# EAGLE board relay-shield (EAGLE 6.4)
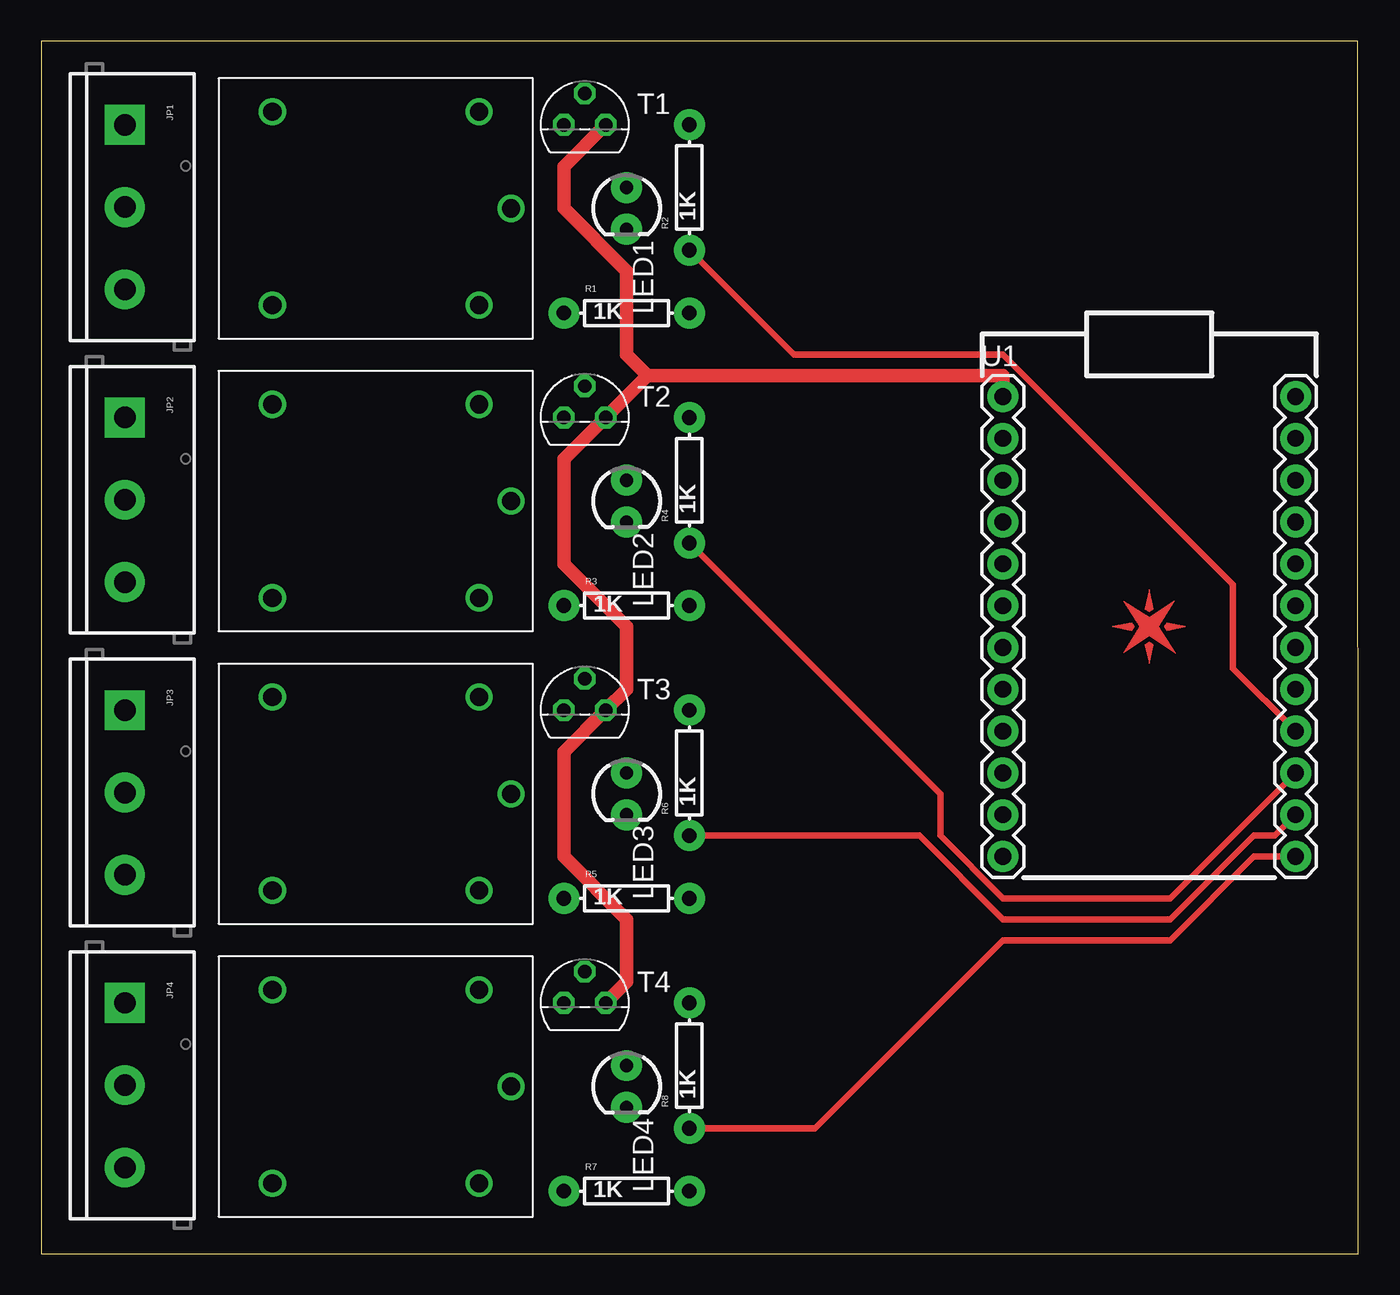
[diagram p0: board, top side]
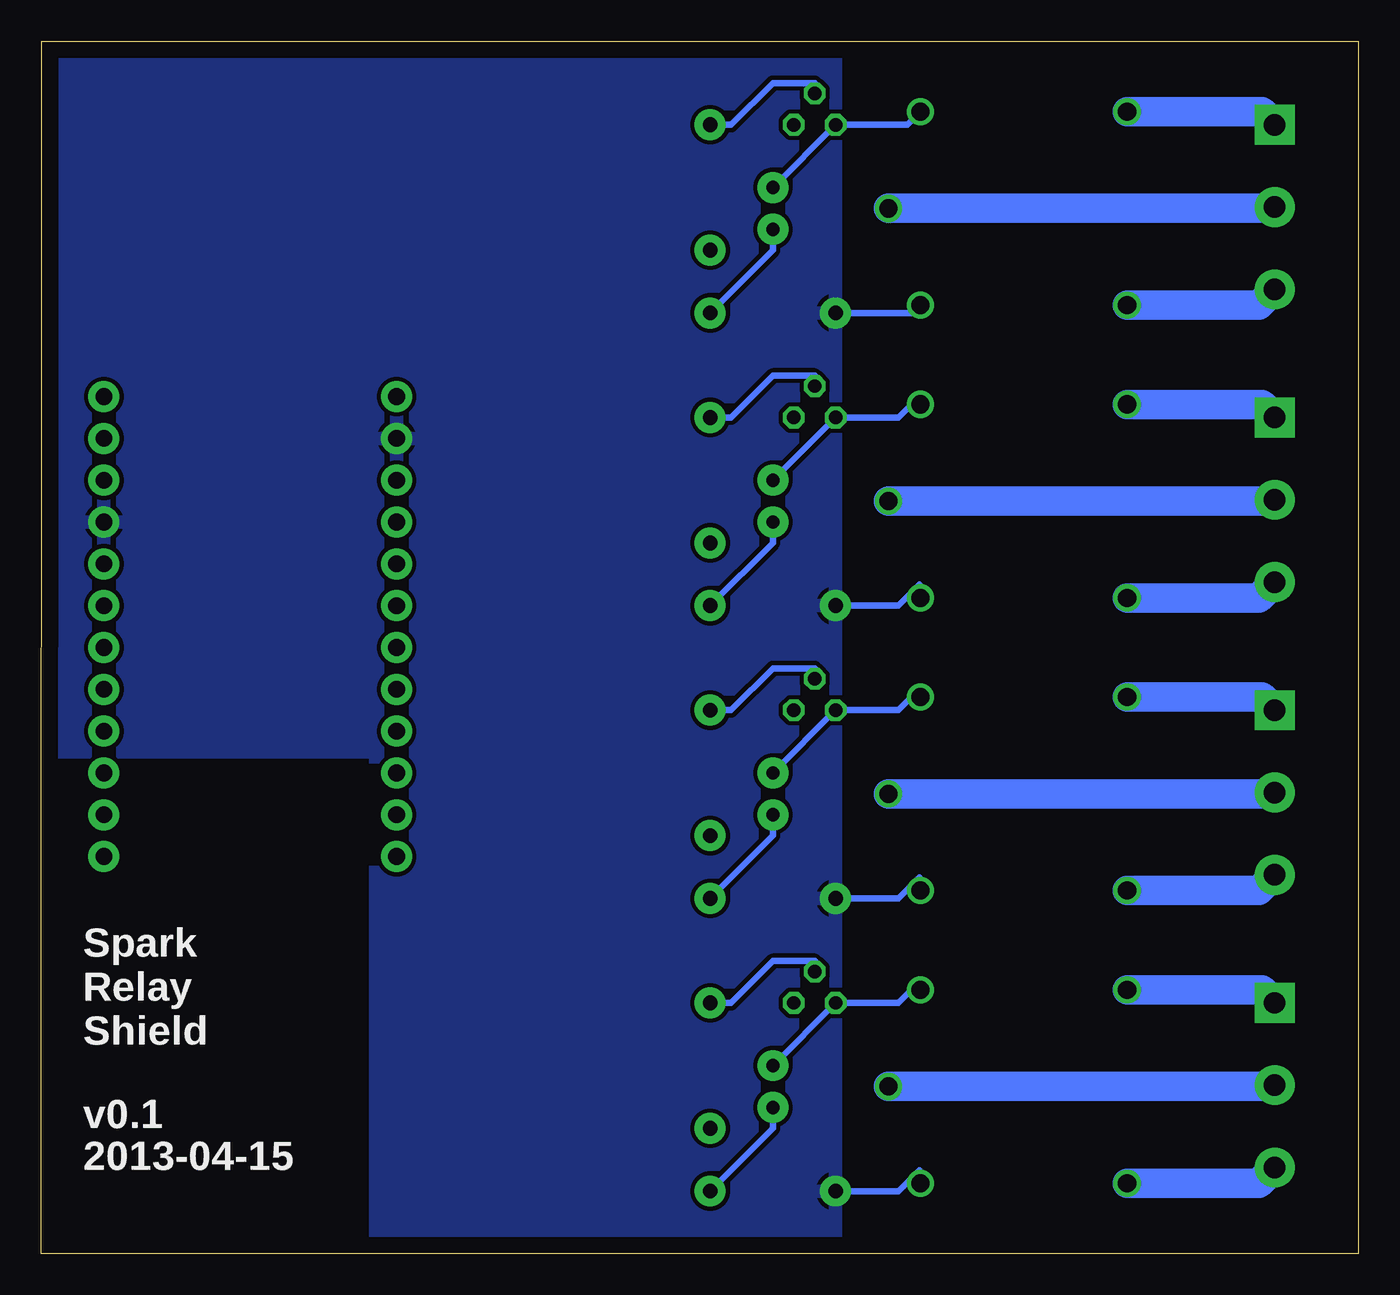
[diagram p1: board, bottom side, seen from below]

Size 80.01 x 73.66 mm. Coordinates in mm from the lower left corner, seen from the top.
Outline: 0,0 80.01,0 79.99,73.66 0,73.66 0,0
Copper layers (1*16): Top 0.035mm / dielectric 1.5mm / Bottom 0.035mm
Design rules "default *": minimum track width 10mil, minimum drill 0.3mm, track to track 10mil, track to pad 10mil, pad to pad 10mil, via to via 10mil, smd to smd 10mil, copper to edge 40mil, drill to drill 8mil, minimum pad ring 10mil, minimum via ring 8mil, stop-mask expansion 4mil, vias tented up to drill 0mil, thermal gap 10mil

## Footprints (pad centres in the part's own frame; a part is rotated, then mirrored left to right if it is on the bottom)
SCREWTERMINAL-5MM-3 = drill 1.3 pad 2.413 square: 1 0,0 | drill 1.3 pad 2.413: 2 5,0; 3 10,0
LED3MM = drill 0.813 pad 1.88: A -1.27,0; K 1.27,0
AXIAL-0.3 = drill 0.9 pad 1.88: P$1 -3.81,0; P$2 3.81,0
TO92 = drill 0.813 octagon: 1 1.27,0; 2 0,1.905; 3 -1.27,0
SPARK_CORE = drill 1.016 pad 1.88: 1 -8.89,13.97; 2 -8.89,11.43; 3 -8.89,8.89; 4 -8.89,6.35; 5 -8.89,3.81; 6 -8.89,1.27; 7 -8.89,-1.27; 8 -8.89,-3.81; 9 -8.89,-6.35; 10 -8.89,-8.89; 11 -8.89,-11.43; 12 -8.89,-13.97; 13 8.89,-13.97; 14 8.89,-11.43; 15 8.89,-8.89; 16 8.89,-6.35; 17 8.89,-3.81; 18 8.89,-1.27; 19 8.89,1.27; 20 8.89,3.81; 21 8.89,6.35; 22 8.89,8.89; 23 8.89,11.43; 24 8.89,13.97
SRD-5VDC-SL-C = drill 1.1: CLOSED -6.275,-5.875; COIL1 6.275,5.875; COIL2 6.275,-5.875; COMMON 8.225,0; OPEN -6.275,5.875

## Placement (x,y rotation side)
E$1  [SPARK_LOGO_PLUS_PLANE]  67.31,38.1 0 top
JP1  [SCREWTERMINAL-5MM-3]  5.08,68.58 270 top
JP2  [SCREWTERMINAL-5MM-3]  5.08,50.8 270 top
JP3  [SCREWTERMINAL-5MM-3]  5.08,33.02 270 top
JP4  [SCREWTERMINAL-5MM-3]  5.08,15.24 270 top
LED1  [LED3MM]  35.56,63.5 270 top
LED2  [LED3MM]  35.56,45.72 270 top
LED3  [LED3MM]  35.56,27.94 270 top
LED4  [LED3MM]  35.56,10.16 270 top
R1  1K  [AXIAL-0.3]  35.56,57.15 0 top
R2  1K  [AXIAL-0.3]  39.37,64.77 90 top
R3  1K  [AXIAL-0.3]  35.56,39.37 0 top
R4  1K  [AXIAL-0.3]  39.37,46.99 90 top
R5  1K  [AXIAL-0.3]  35.56,21.59 0 top
R6  1K  [AXIAL-0.3]  39.37,29.21 90 top
R7  1K  [AXIAL-0.3]  35.56,3.81 0 top
R8  1K  [AXIAL-0.3]  39.37,11.43 90 top
T1  2N3904  [TO92]  33.02,68.58 0 top
T2  2N3904  [TO92]  33.02,50.8 0 top
T3  2N3904  [TO92]  33.02,33.02 0 top
T4  2N3904  [TO92]  33.02,15.24 0 top
U1  SPARK_CORECORE  [SPARK_CORE]  67.31,38.1 0 top
U2  RELAYSONGLE  [SRD-5VDC-SL-C]  20.32,63.5 0 top
U3  RELAYSONGLE  [SRD-5VDC-SL-C]  20.32,45.72 0 top
U4  RELAYSONGLE  [SRD-5VDC-SL-C]  20.32,27.94 0 top
U5  RELAYSONGLE  [SRD-5VDC-SL-C]  20.32,10.16 0 top

## Library data of the parts
E$1 U1-U5 = Spark
JP1-JP4 = SparkFun-Connectors
LED1-LED4 = SparkFun-LED
R1-R8 = SparkFun-Passives
T1-T4 = transistor

## Nets
+5V: T1.1 T2.1 T3.1 T4.1 U1.1
GND: R1.P$1 R3.P$1 R5.P$1 R7.P$1 U1.2 U1.21 U2.COIL2 U3.COIL2 U4.COIL2 U5.COIL2
MAIN1: JP1.2 U2.COMMON
MAIN2: JP2.2 U3.COMMON
MAIN3: JP3.2 U4.COMMON
MAIN4: JP4.2 U5.COMMON
N$1: LED1.A T1.3 U2.COIL1
N$2: LED2.A T2.3 U3.COIL1
N$3: R2.P$2 T1.2
N$4: LED1.K R1.P$2
N$5: R4.P$2 T2.2
N$6: LED2.K R3.P$2
N$7: LED3.A T3.3 U4.COIL1
N$8: R6.P$2 T3.2
N$9: LED3.K R5.P$2
N$10: LED4.A T4.3 U5.COIL1
N$11: R8.P$2 T4.2
N$12: LED4.K R7.P$2
NC1: JP1.3 U2.CLOSED
NC2: JP2.3 U3.CLOSED
NC3: JP3.3 U4.CLOSED
NC4: JP4.3 U5.CLOSED
NO1: JP1.1 U2.OPEN
NO2: JP2.1 U3.OPEN
NO3: JP3.1 U4.OPEN
NO4: JP4.1 U5.OPEN
RELAY1: R2.P$1 U1.16
RELAY2: R4.P$1 U1.15
RELAY3: R6.P$1 U1.14
RELAY4: R8.P$1 U1.13
VCC: U1.24
VDDA: U1.22

## Tracks (layer width: path | path; a pad name or v marks a point on that pad's centre or on a via)
+5V
  Top 0.813: U1.1 58.42,53.34 36.83,53.34 | 36.83,53.34 T2.1 31.75,48.26 31.75,41.91 35.56,38.1 35.56,34.29 T3.1 31.75,30.48 31.75,24.13 35.56,20.32 35.56,16.51 T4.1 | T1.1 31.75,66.04 31.75,63.5 35.56,59.69 35.56,54.61 36.83,53.34
GND
  Bottom 0.406: U2.COIL2 27.07,57.15 R1.P$1 | R3.P$1 27.94,39.37 26.67,40.64 U3.COIL2 | R5.P$1 27.94,21.59 26.67,22.86 U4.COIL2 | R7.P$1 27.94,3.81 26.67,5.08 U5.COIL2
  pour Bottom: 31.75,73.66 31.75,0 59.69,0 59.69,30.48 80.01,30.48 80.01,73.66
MAIN1
  Bottom 1.778: JP1.2 5.16,63.5 U2.COMMON
MAIN2
  Bottom 1.778: JP2.2 5.16,45.72 U3.COMMON
MAIN3
  Bottom 1.778: JP3.2 5.16,27.94 U4.COMMON
MAIN4
  Bottom 1.778: JP4.2 5.16,10.16 U5.COMMON
N$1
  Bottom 0.406: U2.COIL1 27.39,68.58 T1.3 LED1.A
N$2
  Bottom 0.406: U3.COIL1 26.67,52.07 27.94,50.8 T2.3 LED2.A
N$3
  Bottom 0.406: R2.P$2 38.1,68.58 35.56,71.12 33.02,71.12 T1.2
N$4
  Bottom 0.406: LED1.K 35.56,60.96 R1.P$2
N$5
  Bottom 0.406: R4.P$2 38.1,50.8 35.56,53.34 33.02,53.34 T2.2
N$6
  Bottom 0.406: LED2.K 35.56,43.18 R3.P$2
N$7
  Bottom 0.406: U4.COIL1 26.67,34.29 27.94,33.02 T3.3 LED3.A
N$8
  Bottom 0.406: R6.P$2 38.1,33.02 35.56,35.56 33.02,35.56 T3.2
N$9
  Bottom 0.406: LED3.K 35.56,25.4 R5.P$2
N$10
  Bottom 0.406: U5.COIL1 26.67,16.51 27.94,15.24 T4.3 LED4.A
N$11
  Bottom 0.406: R8.P$2 38.1,15.24 35.56,17.78 33.02,17.78 T4.2
N$12
  Bottom 0.406: LED4.K 35.56,7.62 R7.P$2
NC1
  Bottom 1.778: JP1.3 6.04,57.62 U2.CLOSED
NC2
  Bottom 1.778: JP2.3 6.04,39.84 U3.CLOSED
NC3
  Bottom 1.778: JP3.3 6.04,22.07 U4.CLOSED
NC4
  Bottom 1.778: JP4.3 6.04,4.29 U5.CLOSED
NO1
  Bottom 1.778: JP1.1 5.88,69.38 U2.OPEN
NO2
  Bottom 1.778: JP2.1 5.88,51.59 U3.OPEN
NO3
  Bottom 1.778: JP3.1 5.88,33.81 U4.OPEN
NO4
  Bottom 1.778: JP4.1 5.88,16.04 U5.OPEN
RELAY1
  Top 0.406: R2.P$1 45.72,54.61 58.42,54.61 72.39,40.64 72.39,35.56 U1.16
RELAY2
  Top 0.406: R4.P$1 54.61,27.94 54.61,25.4 58.42,21.59 68.58,21.59 U1.15
RELAY3
  Top 0.406: R6.P$1 53.34,25.4 58.42,20.32 68.58,20.32 73.66,25.4 74.93,25.4 U1.14
RELAY4
  Top 0.406: R8.P$1 46.99,7.62 58.42,19.05 68.58,19.05 73.66,24.13 U1.13

## Text on the board
bPlace: Spark / Relay / Shield | v0.1 | 2013-04-15